# Altium PCB PCB.PcbDoc
Units mm, origin at the board's own origin, x right, y up, seen from the top; angles counter-clockwise.
Board outline 38.37 x 34.69 mm, 2 copper layers (Top Layer, Bottom Layer); 23 components, 37 nets, 114 pads, 53 vias.
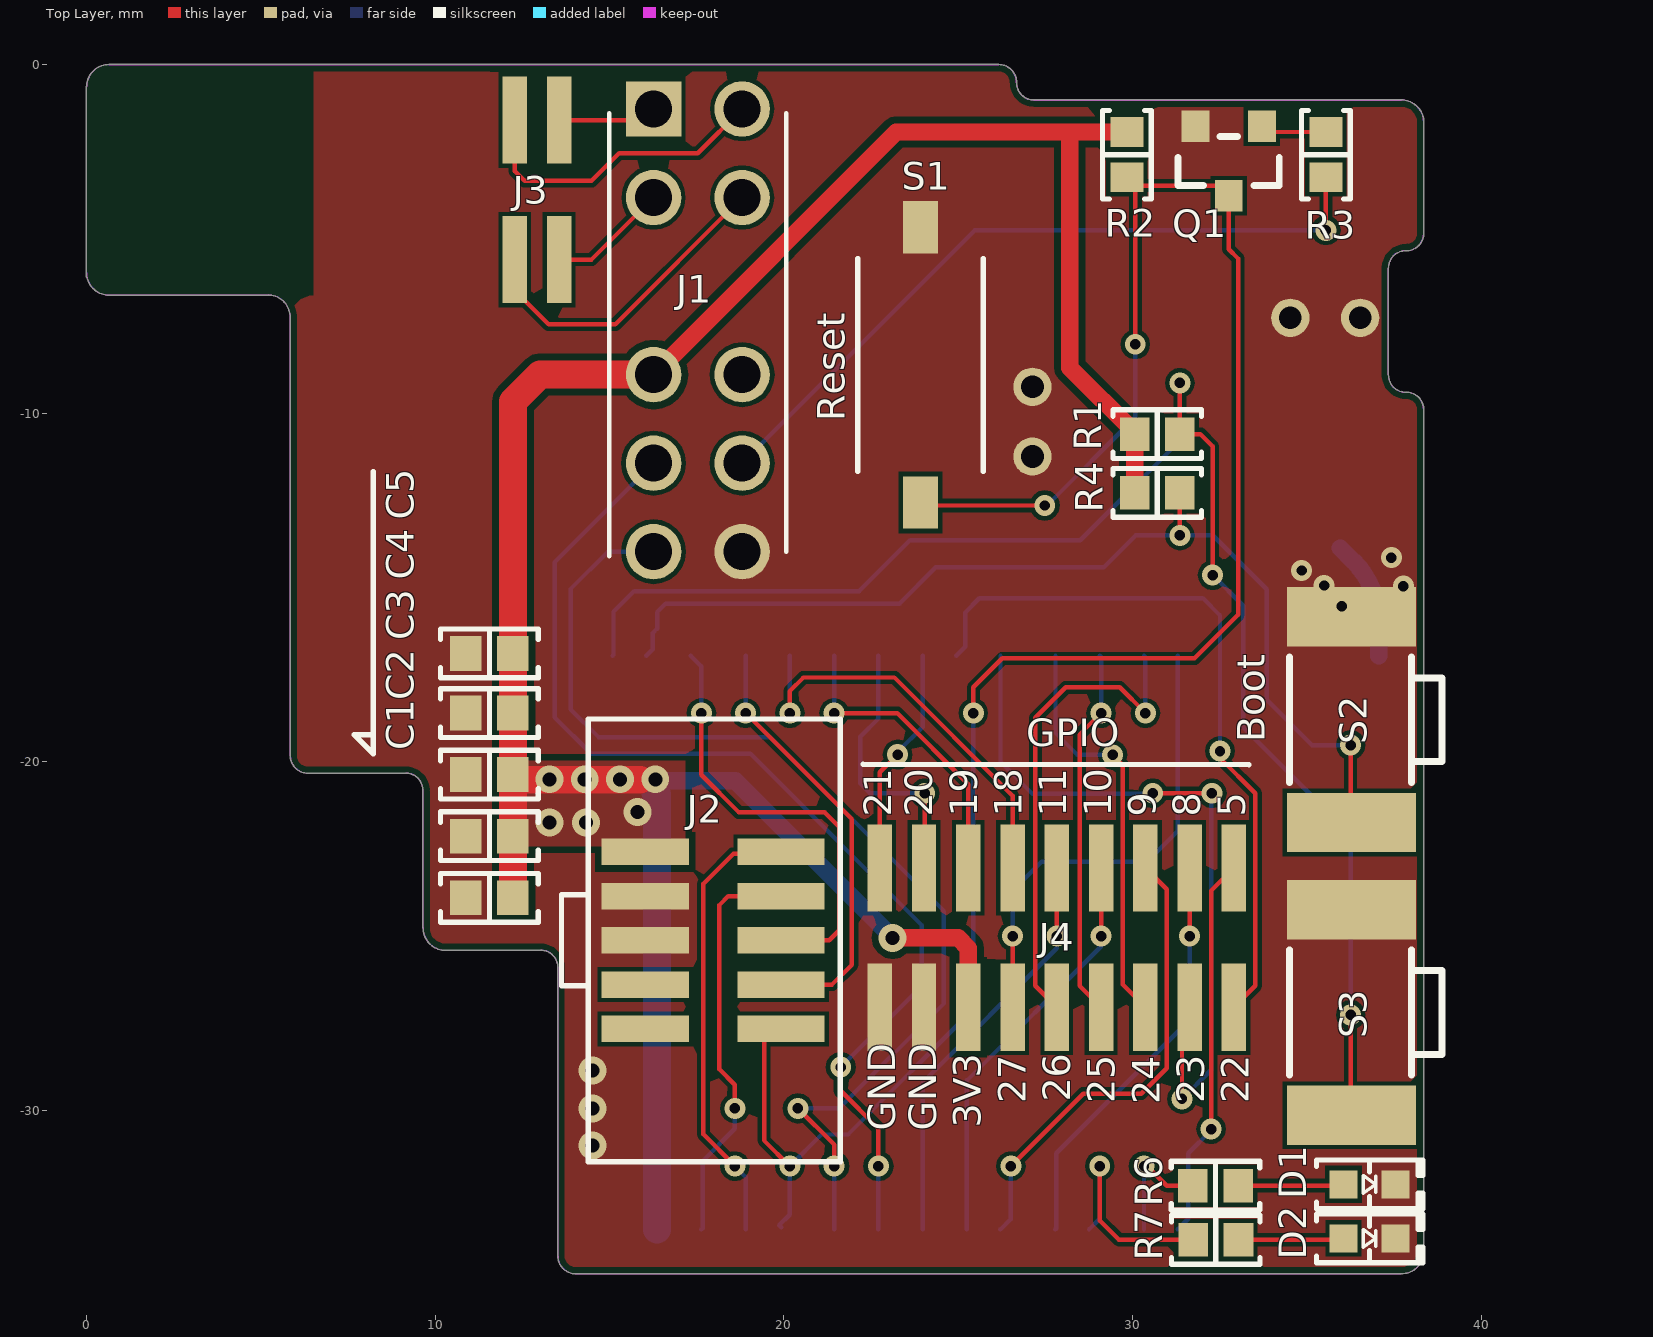
[diagram p0: Top Layer view]
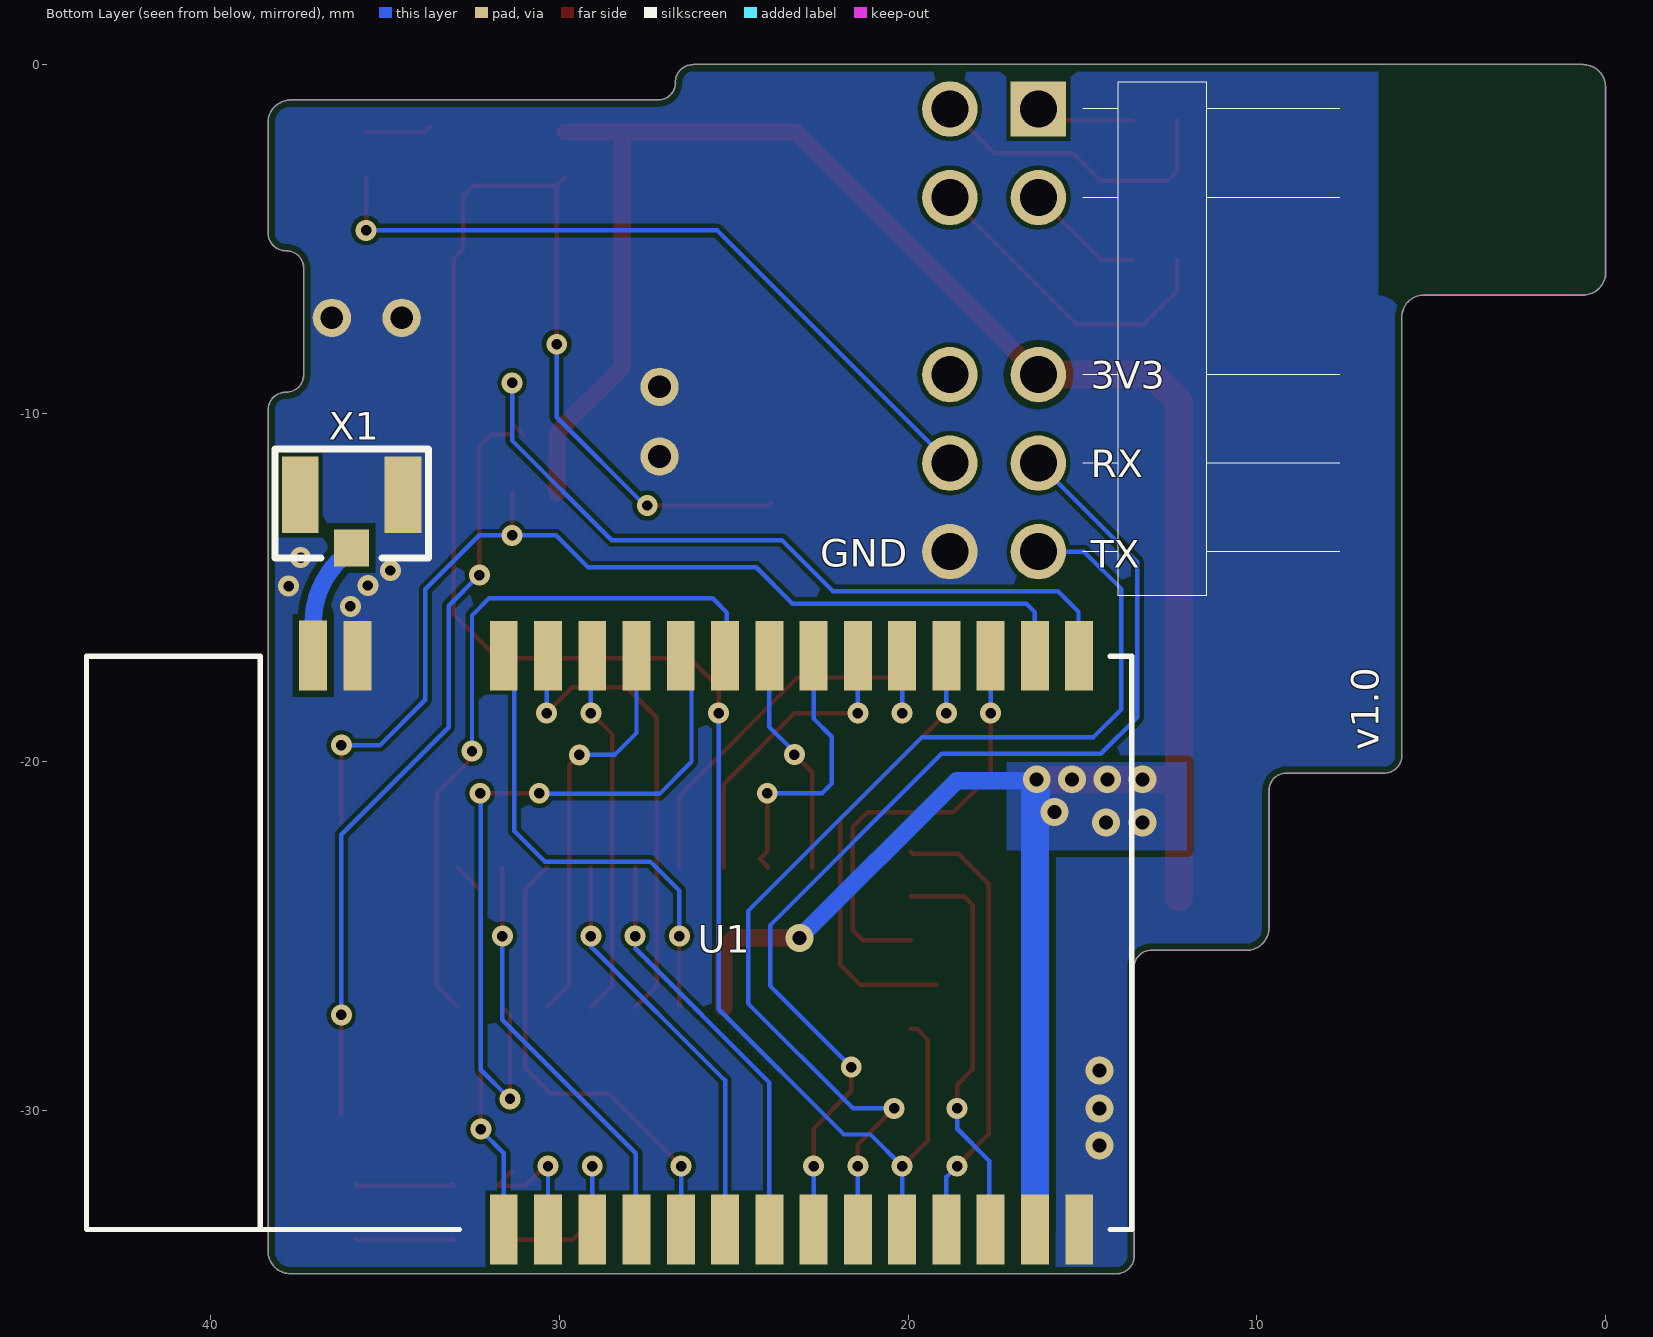
[diagram p1: Bottom Layer view, seen from below]
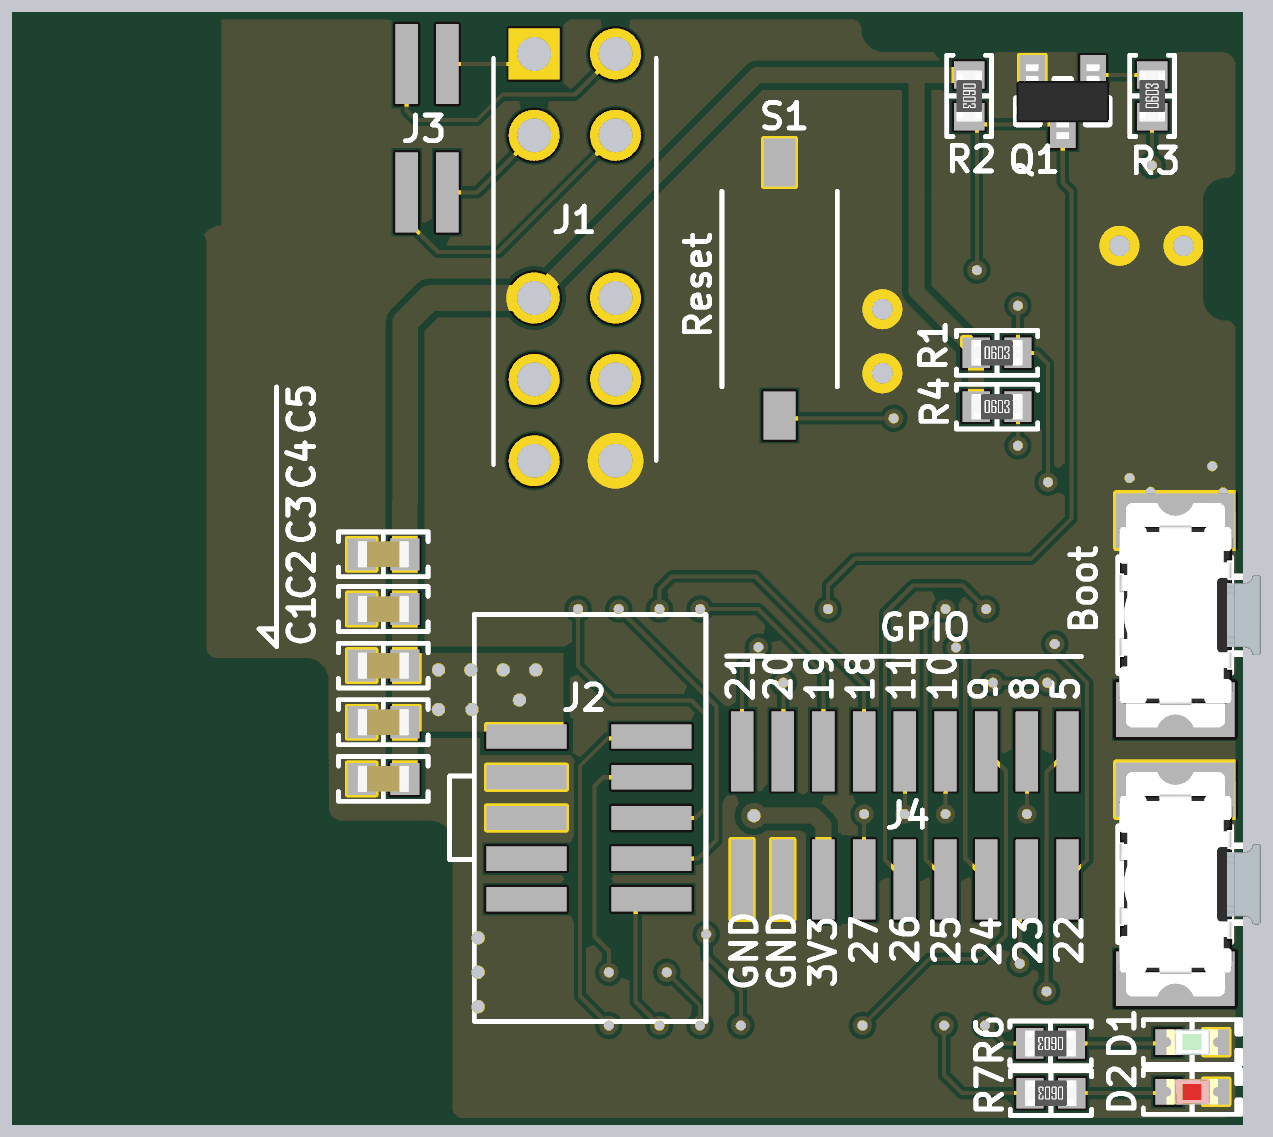
[diagram p2: 3D render of the assembled board from above, using the file's embedded part models]

## Layer stack, top to bottom
Top Solder: solder mask 0.0102, Solder Resist, Dk 3.5
Top Layer: signal copper 0.0356
Dielectric 1: dielectric 0.32, FR-4, Dk 4.8
Bottom Layer: signal copper 0.0356
Bottom Solder: solder mask 0.0102, Solder Resist, Dk 3.5

## Board outline
9.643,-24.765 9.643,-20.82 ccw(c9.15,-20.82) 9.15,-20.327 6.34,-20.327 cw(c6.34,-20.32) 6.34,-20.327 ccw(c6.34,-19.82) 6.34,-20.327 cw(c6.34,-19.82) 5.833,-19.82 cw(c5.84,-19.82) 5.833,-19.82 5.833,-7.239 ccw(c5.205,-7.239) 5.205,-6.611 0.633,-6.611 cw(c0.633,-5.969) 0.005,-6.098 cw(c-0.002,-6.096) -0.009,-6.096 -0.009,-0.635 cw(c0.633,-0.635) 0.633,0.007 26.168,0.007 cw(c26.168,-0.5) 26.675,-0.5 26.675,-0.516 ccw(c27.168,-0.516) 27.168,-1.009 37.717,-1.009 cw(c37.717,-1.651) 38.359,-1.651 38.359,-4.834 cw(c38.352,-4.834) 38.359,-4.834 cw(c37.852,-4.834) 37.852,-5.341 37.836,-5.341 cw(c37.836,-5.834) 37.836,-5.341 ccw(c37.836,-5.834) 37.343,-5.834 37.343,-8.898 ccw(c37.836,-8.898) 37.836,-9.391 37.852,-9.391 cw(c37.852,-9.898) 38.359,-9.898 cw(c38.352,-9.898) 38.358,-9.902 cw(c38.352,-9.906) 38.359,-9.906 38.359,-34.043 cw(c38.352,-34.045) 38.359,-34.045 cw(c37.717,-34.045) 37.717,-34.687 14.02,-34.687 cw(c14.02,-34.18) 13.513,-34.18 13.513,-25.9 ccw(c13.02,-25.9) 13.021,-25.407 cw(c13.02,-25.4) 13.02,-25.407 10.285,-25.407 cw(c10.285,-24.765)

## Design rules (kind name [scope] priority, off if disabled: settings)
BoardOutlineClearance BoardOutlineClearance_BottomSIlk [OnLayer('Bottom Overlay')] p1: gap=0 ignorepadtopadclearanceinfootprint=FALSE
BoardOutlineClearance BoardOutlineClearance_TopSIlk [OnLayer('Top Overlay')] p2: gap=0 ignorepadtopadclearanceinfootprint=FALSE
BoardOutlineClearance [All] p3: gap=0.2 ignorepadtopadclearanceinfootprint=FALSE
Clearance Ant_Spacing [InPolygon vs (InNet('ANT') OR InNet('NetC5_2'))] p1: gap=0.2 ignorepadtopadclearanceinfootprint=FALSE
Clearance Ant_Spacing_1 [InPolygon vs InNet('+3.3V')] p2: gap=0.2 ignorepadtopadclearanceinfootprint=FALSE
Clearance [All] p3: gap=0.127 ignorepadtopadclearanceinfootprint=FALSE except(0.2: Arc-SMDPad Track-SMDPad; 0.25: Arc-Hole Track-Hole SMDPad-Hole THPad-Hole Via-Hole Fill-Hole Poly-Hole Region-Hole Text-Hole; 0.254: Arc-Via Track-Via)
ComponentClearance [All] p1: gap=0.127 collisioncheckmode=3 verticalgap=0.127 showdistances=TRUE
DiffPairsRouting [All] p1: maxlimit=0.254 minlimit=0.127 mostfreqgap=0.127 toplayer_minwidth=0.127 toplayer_maxwidth=25.4 toplayer_prefwidth=0.127 bottomlayer_minwidth=0.127 bottomlayer_maxwidth=25.4 bottomlayer_prefwidth=0.127 maxuncoupledlength=12.7
Height [All] p1: minheight=0 maxheight=1816.048 prefheight=12.7
HoleSize [All] p1: absolutevalues=TRUE maxlimit=6.3 minlimit=0.3 maxpercent=80.000 minpercent=20.000
HoleToHoleClearance [All] p1: gap=0.25 allowstackedmicrovias=FALSE
MinimumAnnularRing [All] p1: minimumring=0.076
MinimumSolderMaskSliver [All] p1: minsoldermaskwidth=0
PlaneClearance [All] p1: clearance=0.127
PlaneConnect PlaneConnectPowerPads [InPadClass('PowerPads')] p1: planeconnectstyle=Direct reliefexpansion=0.508 reliefentries=4 reliefconductorwidth=0.254 reliefairgap=0.254
PlaneConnect [All] p2: pad.planeconnectstyle=Relief pad.reliefexpansion=0.3 pad.reliefentries=4 pad.reliefconductorwidth=0.127 pad.reliefairgap=0.127 via.planeconnectstyle=Direct via.reliefexpansion=0.3 via.reliefentries=4 via.reliefconductorwidth=0.127 via.reliefairgap=0.127
PolygonConnect PolygonConnectPowerPads [All vs (InPadClass('PowerPads'))] p1: connectstyle=Direct reliefconductorwidth=0.254 reliefentries=4 polygonreliefangle="90 Angle" airgapwidth=0.254
PolygonConnect [All] p2: connectstyle=Direct reliefconductorwidth=0.127 reliefentries=4 polygonreliefangle="90 Angle" airgapwidth=0.127
RoutingVias [All] p1: holewidth=0.3 width=0.6 viastyle="Through Hole" minholewidth=0.3 minwidth=0.6 maxholewidth=0.6 maxwidth=6.6
SilkToSilkClearance [All] p1: silktosilkclearance=0
SilkToSolderMaskClearance [IsPad] p1: minsilkscreentomaskgap=0.1 clearancetoexposedcopper=TRUE
SolderMaskExpansion SolderMaskExpansion_Via [IsVia] p1: expansion=0.102 istentingtop=TRUE
SolderMaskExpansion [All] p2: expansion=0.075 istentingtop=FALSE
Width Antenna [InNet('ANT')] p1: maxlimit=0.5 minlimit=0.5 preferedwidth=0.5 minimp=50.000000 maximp=50.000000 favimp=50.000000
Width Signal [(InNet('PB*') OR InNet('PA*') OR InNet('DIO*') OR InNet('SWD*') OR InNet('I2C*'))] p2: maxlimit=0.254 minlimit=0.127 preferedwidth=0.127 minimp=50.000000 maximp=50.000000 favimp=50.000000
Width Power [InNet('+3.3V')] p3: maxlimit=2 minlimit=0.5 preferedwidth=0.5 minimp=50.000000 maximp=50.000000 favimp=50.000000
Width [All] p4: maxlimit=25.4 minlimit=0.127 preferedwidth=0.127 minimp=50.000000 maximp=50.000000 favimp=50.000000
20 further rules are at their usual default settings.

## Components (designator, comment, footprint, x,y, rotation, side; value= is the part's Value field where it differs from the comment)
C1 "10µF" "CAP 0603_1608" 11.55,-23.9 r180 top
C2 "10µF" "CAP 0603_1608" 11.55,-22.133 r180 top
C3 "1µF" "CAP 0603_1608" 11.55,-20.367 r180 top
C4 "0.1µF" "CAP 0603_1608" 11.55,-18.6 r0 top
C5 "10µF" "CAP 0603_1608" 11.55,-16.89 r180 top
D1 "Green" "LED 0603_1608 GREEN" 36.8,-32.12 r0 top
D2 "Red" "LED 0603_1608 RED" 36.8,-33.67 r0 top
J1 "C60565" C60565 16.26,-1.27 r0 top locked
J2 "JTAG Connector" 2X1.27X10 16.02,-22.58 r0 top
J3 "Pins" 1.27x4 13.55,-1.59 r180 top
J4 "GPIO" 1.27x18 32.91,-23.04 r270 top
Q1 "BC847CLT1G" "ON SEMI SOT-23-3" 32.76,-2.76 r270 top
R1 "10 kOhms" "RES 0603_1608" 30.71,-10.6 r0 top
R2 "10 kOhms" "RES 0603_1608" 29.84,-2.58 r270 top
R3 "10 kOhms" "RES 0603_1608" 35.55,-2.58 r90 top
R4 "10 kOhms" "RES 0603_1608" 30.71,-12.28 r0 top
R6 "470 Ohms" "RES 0603_1608" 32.38,-32.16 r180 top
R7 "470 Ohms" "RES 0603_1608" 32.39,-33.71 r180 top
S1 "K2-1107ST-A3SW-06" BTN 23.92,-12.56 r0 top
S2 "KSS331GLFS" "C&K KSS" 36.28,-18.79 r90 top
S3 "KSS331GLFS" "C&K KSS" 36.28,-27.19 r90 top
U1 "RF-BM-2652P2" RF-BM-2652P2 31.6,-33.415 r90 bottom locked
X1 "U.FL-R-SMT(01)" "CON: u.Fl" 35.965,-12.34 r180 bottom

## Footprints (in the part's own frame and the unit in brackets; to place one, negate y for a bottom-side part, rotate by r counter-clockwise, add the part's x,y. Pads: shape width x height; smd on the part's side, far side on the other; paste and mask are expansions set on the pad)
1.27x4 [mm]
  rect 0.7x2.5 smd: 1(0,4) 2(1.27,4) 3(0,0) 4(1.27,0)
1.27x18 [mm]
  rect 2.5x0.7 smd: 1(0,0) 2(4,0) 3(0,-1.27) 4(4,-1.27) 5(0,-2.54) 6(4,-2.54) 7(0,-3.81) 8(4,-3.81) 9(0,-5.08) 10(4,-5.08) 11(0,-6.35) 12(4,-6.35) 13(0,-7.62) 14(4,-7.62) 15(0,-8.89) 16(4,-8.89) 17(0,-10.16) 18(4,-10.16)
2X1.27X10 [mm]
  rect 2.5x0.76 smd: 1(0,0) 2(3.9,0) 3(0,-1.27) 4(3.9,-1.27) 5(0,-2.54) 6(3.9,-2.54) 7(0,-3.81) 8(3.9,-3.81) 9(0,-5.08) 10(3.9,-5.08)
  silkscreen extent -2.4,-8.89 5.6,3.81
BTN [mm]
  rect 1x1.5 smd: 1(0,0) 2(0,7.9)
  silkscreen extent -1.8,0.9 1.8,7, body extent -1.83,-0.13 1.83,7.93, height 2.51
C60565 [mm] "Pin Header 12 2 right-angle,90degrees 2.54mm P=2.54mm Pin Header & Female Header RoHS"
  rect 1.59x1.59 hole 1.06: 1(0,0)
  round 1.59 hole 1.06: 2(2.54,0) 3(0,-2.54) 4(2.54,-2.54) 7(0,-7.62) 8(2.54,-7.62) 9(0,-10.16) 10(2.54,-10.16) 11(0,-12.7) 12(2.54,-12.7)
  silkscreen extent -1.27,-12.83 3.81,-0.13
"C&K KSS" [mm] "SMT Switch, 2-leads, body 5.5x3.5mm, C&K KSS331GLFS"
  rect 1.7x3.7 smd mask+0.1: 1(-2.95,0) 2(2.95,0)
  silkscreen extent -1.8,-2.6 1.8,1.78, body extent -3.5,-2.65 3.5,1.76, height 2.28
"CAP 0603_1608" [mm] "Chip Capacitor, 2-Leads, Body 1.60x0.80mm, IPC Medium Density"
  rect 0.9x1 smd: 1(-0.675,0) 2(0.675,0)
  silkscreen extent -1.4,-0.7 1.4,0.7, body extent -0.8,-0.41 0.8,0.41, height 0.82
"CON: u.Fl" [mm]
  rect 1x1.05 smd: 1(0,-1.525)
  rect 1.05x2.2 smd: 2(1.475,0) 3(-1.475,0)
  silkscreen extent -2.2,-1.81 2.2,1.31, body extent -1.5,-1.71 1.5,1.14, height 1.27
"LED 0603_1608 GREEN" [mm] "Chip Diode, 2-Leads, Body 1.60x0.80mm, IPC Medium Density"
  rect 0.8x0.8 smd: 1(-0.75,0) 2(0.75,0)
  silkscreen extent -1.52,-0.7 1.52,0.7, body extent -0.8,-0.4 0.8,0.4, height 0.53
"LED 0603_1608 RED" [mm] "Chip Diode, 2-Leads, Body 1.60x0.80mm, IPC Medium Density"
  rect 0.8x0.8 smd: 1(-0.75,0) 2(0.75,0)
  silkscreen extent -1.52,-0.7 1.52,0.7, body extent -0.8,-0.4 0.8,0.4, height 0.53
"ON SEMI SOT-23-3" [mm] "SOT23, 3-Leads, Body 2.90x2.40mm, Pitch 0.95mm, IPC Medium Density"
  rect 0.9x0.8 smd: 1(-1,0.95) 2(-1,-0.95) 3(1,0)
  silkscreen extent -0.7,-1.45 0.7,1.45, body extent -1.16,-1.45 1.16,1.45, height 1
"RES 0603_1608" [mm] "Chip Resistor, 2-Leads, Body 1.60x0.80mm, IPC Medium Density"
  rect 0.85x0.95 smd: 1(-0.65,0) 2(0.65,0)
  silkscreen extent -1.27,-0.7 1.27,0.7, body extent -0.8,-0.4 0.8,0.4, height 0.45
RF-BM-2652P2 [mm]
  rect 2x0.8 smd: 1(0,0) 2(0,-1.27) 3(0,-2.54) 4(0,-3.81) 5(0,-5.08) 6(0,-6.35) 7(0,-7.62) 8(0,-8.89) 9(0,-10.16) 10(0,-11.43) 11(0,-12.7) 12(0,-13.97) 13(0,-15.24) 14(0,-16.51) 15(16.462,-16.509) 16(16.462,-15.239) 17(16.462,-13.969) 18(16.462,-12.699) 19(16.462,-11.429) 20(16.462,-10.159) 21(16.462,-8.889) 22(16.462,-7.619) 23(16.462,-6.349) 24(16.462,-5.079) 25(16.462,-3.809) 26(16.462,-2.539) 27(16.462,-1.269) 28(16.462,0.001) 29(16.458,4.199) 30(16.465,5.469)
  silkscreen extent 0,-18.02 16.45,11.97

## Part data
C1 C2 C5: library part GRM188R60J106ME47D, "CAP CER 10UF 6.3V X5R 0603", Device Package="0603 (1608 Metric)", Manufacturer="Murata Electronics", Operating Temperature="-55°C ~ 85°C", Supplier Part Number 1=490-3896-1-ND, Temperature Coefficient=X5R, Tolerance=±20%, Voltage - Rated=6.3V, Applications="General Purpose", Capacitance=10µF, ComponentLink1Description=Datasheet, ComponentLink1URL=https://www.murata.com/~/media/webrenewal/support/library/catalog/products/capacitor/mlcc/c02e.ashx?la=en-us, ComponentLink2Description="DigiKey Link", ComponentLink2URL=http://digikey.com/product-detail/en/murata-electronics/GRM188R60J106ME47D/490-3896-1-ND/965938, LastUpdated="2020-09-02 01:03:35.500000", Lifecycle Status=Active, Minimum Order=1, Mounting Type="Surface Mount, MLCC", Package / Case="0603 (1608 Metric)", Packaging=TapeAndReel, Part Number=GRM188R60J106ME47D, Part Status=Active, PartId=2351, Price=0.03, Series=GRM, Size / Dimension="0.063 L x 0.031 W (1.60mm x 0.80mm)", Supplier 1=DigiKey, Thickness (Max)="0.035 (0.90mm)"
C3: library part GCM188R71C105KA64D, "CAP CER 1UF 16V X7R 0603", Device Package="0603 (1608 Metric)", Manufacturer="Murata Electronics", Operating Temperature="-55°C ~ 125°C", Ratings=AEC-Q200, Supplier Part Number 1=490-5241-1-ND, Temperature Coefficient=X7R, Tolerance=±10%, Voltage - Rated=16V, Applications=Automotive, Capacitance=1µF, ComponentLink1Description=Datasheet, ComponentLink1URL=https://www.murata.com/~/media/webrenewal/support/library/catalog/products/capacitor/mlcc/c03e.ashx?la=en-us, ComponentLink2Description="DigiKey Link", ComponentLink2URL=http://digikey.com/product-detail/en/murata-electronics/GCM188R71C105KA64D/490-5241-1-ND/1979252, LastUpdated="2020-09-02 01:03:17.027000", Lifecycle Status=Active, Minimum Order=1, Mounting Type="Surface Mount, MLCC", Package / Case="0603 (1608 Metric)", Packaging=TapeAndReel, Part Number=GCM188R71C105KA64D, Part Status=Active, PartId=12672, Price=0.04, Series=GCM, Size / Dimension="0.063 L x 0.031 W (1.60mm x 0.80mm)", Supplier 1=DigiKey, Thickness (Max)="0.035 (0.90mm)"
C4: library part GCJ188R71C104KA01D, "CAP CER 0.1UF 16V X7R 0603", Device Package="0603 (1608 Metric)", Manufacturer="Murata Electronics", Operating Temperature="-55°C ~ 125°C", Ratings=AEC-Q200, Supplier Part Number 1=490-5796-1-ND, Temperature Coefficient=X7R, Tolerance=±10%, Voltage - Rated=16V, Applications="Automotive, Boardflex Sensitive", Capacitance=0.1µF, ComponentLink1Description=Datasheet, ComponentLink1URL=https://www.murata.com/~/media/webrenewal/support/library/catalog/products/capacitor/mlcc/c03e.ashx?la=en-us, ComponentLink2Description="DigiKey Link", ComponentLink2URL=http://digikey.com/product-detail/en/murata-electronics/GCJ188R71C104KA01D/490-5796-1-ND/2783830, Features="Soft Termination", LastUpdated="2020-09-02 01:03:00.960000", Lifecycle Status=Active, Minimum Order=1, Mounting Type="Surface Mount, MLCC", Package / Case="0603 (1608 Metric)", Packaging=TapeAndReel, Part Number=GCJ188R71C104KA01D, Part Status=Active, PartId=17928, Price=0.05, Series=GCJ, Size / Dimension="0.063 L x 0.031 W (1.60mm x 0.80mm)", Supplier 1=DigiKey, Thickness (Max)="0.035 (0.90mm)"
D1: library part APT1608CGCK, "LED GREEN CLEAR CHIP SMD", Current - Test=20mA, Device Package="0603 (1608 Metric)", Lens Color=Colorless, Manufacturer=Kingbright, Millicandela Rating=50mcd, Supplier Device Package="Chip LED", Supplier Part Number 1=754-1116-1-ND, Voltage - Forward (Vf) (Typ)=2.1V, Color=Green, ComponentLink1Description=Datasheet, ComponentLink1URL=http://www.kingbrightusa.com/images/catalog/SPEC/APT1608CGCK.pdf, ComponentLink2Description="DigiKey Link", ComponentLink2URL=http://digikey.com/product-detail/en/kingbright/APT1608CGCK/754-1116-1-ND/1747833, Configuration=Standard, Height (Max)=0.75mm, LastUpdated="2020-09-02 01:20:41.777000", Lens Size="1.20mm x 0.80mm", Lens Style="Rectangle with Flat Top", Lens Transparency=Clear, Lifecycle Status=Active, Minimum Order=1, Mounting Type="Surface Mount", Package / Case="0603 (1608 Metric)", Packaging=TapeAndReel, Part Number=APT1608CGCK, Part Status=Active, PartId=664, Price=0.07, Series=-, Size / Dimension="1.60mm L x 0.80mm W", Supplier 1=DigiKey, Viewing Angle=120°, Wavelength - Dominant=570nm, Wavelength - Peak=574nm
D2: library part APT1608EC, "LED RED CLEAR CHIP SMD", Current - Test=20mA, Device Package="0603 (1608 Metric)", Lens Color=Colorless, Manufacturer=Kingbright, Millicandela Rating=8mcd, Supplier Device Package="Chip LED", Supplier Part Number 1=754-1117-1-ND, Voltage - Forward (Vf) (Typ)=2V, Color=Red, ComponentLink1Description=Datasheet, ComponentLink1URL=http://www.kingbrightusa.com/images/catalog/SPEC/APT1608EC.pdf, ComponentLink2Description="DigiKey Link", ComponentLink2URL=http://digikey.com/product-detail/en/kingbright/APT1608EC/754-1117-1-ND/1747834, Configuration=Standard, Height (Max)=0.75mm, LastUpdated="2020-09-02 01:20:55.660000", Lens Size="1.20mm x 0.80mm", Lens Style="Rectangle with Flat Top", Lens Transparency=Clear, Lifecycle Status=Active, Minimum Order=1, Mounting Type="Surface Mount", Package / Case="0603 (1608 Metric)", Packaging=TapeAndReel, Part Number=APT1608EC, Part Status=Active, PartId=458, Price=0.06, Series=-, Size / Dimension="1.60mm L x 0.80mm W", Supplier 1=DigiKey, Viewing Angle=120°, Wavelength - Dominant=617nm, Wavelength - Peak=627nm
J1: "Pin Header 12 2 right-angle，90degrees 2.54mm P=2.54mm Pin Header & Female Header RoHS", Package=None, Availability=Unavailable, Check_prices=https://www.snapeda.com/parts/BG040-14-A-0300-0300-N-G/Global%20Connector%20Technology/view-part/2751851/?ref=eda, MF="Global Connector Technology", MP=BG040-14-A-0300-0300-N-G, Price=None, SnapEDA_Link=https://www.snapeda.com/parts/BG040-14-A-0300-0300-N-G/Global%20Connector%20Technology/view-part/2751851/?ref=snap
Q1: "TRANS NPN 45V 0.1A SOT23", Current - Collector (Ic) (Max)=100mA, Current - Collector Cutoff (Max)="15nA (ICBO)", DC Current Gain (hFE) (Min) @ Ic, Vce="420 @ 2mA, 5V", Frequency - Transition=100MHz, Manufacturer="ON Semiconductor", Operating Temperature="-55°C ~ 150°C (TJ)", Package / Case="TO-236-3, SC-59, SOT-23-3", Power - Max=300mW, Supplier Device Package="SOT-23-3 (TO-236)", Supplier Part Number 1=BC847CLT1GOSCT-ND, Voltage - Collector Emitter Breakdown (Max)=45V, ComponentLink1Description=Datasheet, ComponentLink1URL=http://www.onsemi.com/pub/Collateral/BC846ALT1-D.PDF, ComponentLink2Description="DigiKey Link", ComponentLink2URL=http://digikey.com/product-detail/en/on-semiconductor/BC847CLT1G/BC847CLT1GOSCT-ND/917836, LastUpdated="2020-09-02 01:30:09.047000", Lifecycle Status=Active, Minimum Order=1, Mounting Type="Surface Mount", Packaging=TapeAndReel, Part Number=BC847CLT1G, Part Status=Active, PartId=252, Price=0.02, Series=-, Supplier 1=DigiKey, Transistor Type=NPN, Vce Saturation (Max) @ Ib, Ic="600mV @ 5mA, 100mA"
R1 R2 R3 R4: library part RT0603DRD0710KL, "RES SMD 10K OHM 0.5% 1/10W 0603", Device Package="0603 (1608 Metric)", Manufacturer=Yageo, Operating Temperature="-55°C ~ 155°C", Power (Watts)="0.1W, 1/10W", Supplier Device Package=0603, Supplier Part Number 1=311-10KDCT-ND, Temperature Coefficient=±25ppm/°C, Tolerance=±0.5%, ComponentLink1Description=Datasheet, ComponentLink1URL=https://www.yageo.com/upload/media/product/productsearch/datasheet/rchip/PYu-RT_1-to-0.01_RoHS_L_11.pdf, ComponentLink2Description="DigiKey Link", ComponentLink2URL=http://digikey.com/product-detail/en/yageo/RT0603DRD0710KL/311-10KDCT-ND/1035680, Composition="Thin Film", Height - Seated (Max)="0.022 (0.55mm)", LastUpdated="2020-09-02 01:10:23.407000", Lifecycle Status=Active, Minimum Order=1, Number of Terminations=2, Package / Case="0603 (1608 Metric)", Packaging=TapeAndReel, Part Number=RT0603DRD0710KL, Part Status=Active, PartId=5487, Price=0.02, Resistance="10 kOhms", Series=RT, Size / Dimension="0.063 L x 0.031 W (1.60mm x 0.80mm)", Supplier 1=DigiKey
R6 R7: library part AT0603FRE07470RL, "RES SMD 470 OHM 1% 1/10W 0603", Device Package="0603 (1608 Metric)", Manufacturer=Yageo, Operating Temperature="-55°C ~ 155°C", Power (Watts)="0.1W, 1/10W", Ratings=AEC-Q200, Supplier Device Package=0603, Supplier Part Number 1=YAG2128CT-ND, Temperature Coefficient=±50ppm/°C, Tolerance=±1%, ComponentLink1Description=Datasheet, ComponentLink1URL=http://www.yageo.com/documents/recent/PYu-AT_51_RoHS_L_5.pdf, ComponentLink2Description="DigiKey Link", ComponentLink2URL=http://digikey.com/product-detail/en/yageo/AT0603FRE07470RL/YAG2128CT-ND/5139576, Composition="Thin Film", Features="Anti-Sulfur, Automotive AEC-Q200, Moisture Resistant", Height - Seated (Max)="0.022 (0.55mm)", LastUpdated="2020-09-02 01:10:20.073000", Lifecycle Status=Active, Minimum Order=1, Number of Terminations=2, Package / Case="0603 (1608 Metric)", Packaging=TapeAndReel, Part Number=AT0603FRE07470RL, Part Status=Active, PartId=7105, Price=0.02, Resistance="470 Ohms", Series=AT, Size / Dimension="0.063 L x 0.031 W (1.60mm x 0.80mm)", Supplier 1=DigiKey
S1: library part Btn
S2 S3: "SWITCH TACTILE SPST-NO 0.05A 50V", Contact Rating @ Voltage="0.05A @ 50VDC", Manufacturer=C&K, Operating Force=250gf, Operating Temperature="-40°C ~ 85°C", Supplier Part Number 1=401-1101-1-ND, Actuator Orientation="Side Actuated", Actuator Type="Rectangular Button", Circuit=SPST-NO, ComponentLink1Description=Datasheet, ComponentLink1URL=https://dznh3ojzb2azq.cloudfront.net/products/Tactile/KSS/documents/datasheet.pdf, ComponentLink2Description="DigiKey Link", ComponentLink2URL=http://digikey.com/product-detail/en/c-k/KSS331GLFS/401-1101-1-ND/417673, Features="Tactile Feedback", Illumination=Non-Illuminated, Ingress Protection=IP40, LastUpdated="2020-04-09 09:55:46.287000", Lifecycle Status=Active, Minimum Order=1, Mounting Type="Surface Mount, Right Angle", Outline="7.60mm x 3.70mm", Packaging=TapeAndReel, Part Number=KSS331GLFS, Part Status=Active, Price=0.35, Series=KSS, Supplier 1=DigiKey, Switch Function=Off-Mom, Termination Style="Gull Wing"
X1: Frequency=6GHz, Manufacturer="Hirose Electric", ValueManufacturerPartNumber="Connector u.FL, 50 Ohm, 6GHz", HelpURL=https://www.digikey.com/product-detail/en/hirose-electric-co-ltd/U.FL-R-SMT-01/H9161-ND/513010, Impedance="50 Ohm", PartNumber=U.FL-R-SMT(01), TypeConnector="Connector u.FL"

## Free pads (board coordinates)
  round 1.1 hole 0.65: 2(27.13,-11.24) 2(27.13,-9.24) 2(34.53,-7.26) 2(36.53,-7.26)

## Via types
v1: diameter 0.6, hole 0.3, Top Layer to Bottom Layer, tented both sides, 42 vias
v2: diameter 0.8, hole 0.4, Top Layer to Bottom Layer, tented both sides, 11 vias

## Nets (pads, with @x,y where several pads share a name; then routed paths per layer and width w, separated by ;. In a path a pad name is that pad's centre, name@x,y a point inside that pad or via, vN(x,y) a via of type N, cw(c..) or ccw(c..) an arc to the next point about the centre after c; other vN are vias at no path point)
+3.3V: C1.1 C2.1 C3.1 C4.2 C5.1 J1.7 J2.1 J4.14 R1.1 R2.1 R4.1 U1.13 | length 75.2
  Top Layer w0.5: J1.7 23.22,-1.93 28.346,-1.93 ; v2(23.12,-25.05) 24.997,-25.05 25.29,-25.343 J4.14 ; R2.1 28.346,-1.93 ; R4.1 R1.1 30.06,-10.55 28.2,-8.69 28.2,-2.076 28.346,-1.93
  Top Layer w0.8: C1.1 C2.1 C3.1@12.225,-20.513 ; 15.879,-20.513 C3.1@12.225,-20.513 ; J1.7 13,-8.89 12.23,-9.66 12.23,-15.265 12.225,-15.27 C3.1@12.225,-20.513
  Bottom Layer w0.5: v2@16.31,-20.89 16.66,-20.54 18.61,-20.54 v2(23.12,-25.05)
  Bottom Layer w0.8: v2@16.31,-20.89 16.36,-20.94 U1.13
  other v2: 13.272,-21.737 14.32,-21.737 15.8,-21.44 13.272,-20.5 14.285,-20.5 15.297,-20.5 16.31,-20.5
ANT: U1.30 X1.1 | length 3.4
  Bottom Layer w0.5: X1.1 36.325,-14.225 cw(c34.529,-16.021) 37.069,-16.021 U1.30
DIO5: J4.1 U1.1 | length 11
  Top Layer w0.127: v1(32.254,-30.536) 32.257,-30.532 32.257,-23.693 J4.1
  Bottom Layer w0.127: U1.1@31.291,-33.415 31.6,-33.106 31.6,-31.23 32.254,-30.576 v1(32.254,-30.536)
DIO8: J4.3 U1.4 | length 12
  Top Layer w0.127: v1@31.64,-25.01 J4.3
  Bottom Layer w0.127: U1.4 27.81,-33.395 27.81,-31.23 31.64,-27.4 v1@31.64,-25.01
  other v1: 31.64,-25
DIO9: J4.5 U1.5 | length 13.7
  Top Layer w0.127: v1(26.51,-31.6) 28.59,-29.52 30.25,-29.52 30.984,-28.786 30.984,-23.654 J4.5
  Bottom Layer w0.127: U1.5@26.211,-33.415 26.51,-33.116 v1(26.51,-31.6) v1@26.437,-31.6
DIO10: J4.7 U1.6 | length 12
  Top Layer w0.127: v1@29.1,-25.04 J4.7
  Bottom Layer w0.127: U1.6 25.25,-29.14 29.1,-25.29 v1@29.1,-25.04
  other v1: 29.1,-25
DIO11: J4.9 U1.7 | length 11.6
  Top Layer w0.127: v1(27.83,-25) J4.9
  Bottom Layer w0.127: U1.7 23.98,-29.2 27.83,-25.35
DIO18: J4.11 U1.19 | length 12.3
  Top Layer w0.127: v1(20.171,-18.6) 20.171,-17.969 20.56,-17.58 23.17,-17.58 26.56,-20.97 J4.11
  Bottom Layer w0.127: v1(20.171,-18.6) U1.19
DIO19: J4.13 U1.20 | length 8.7
  Top Layer w0.127: v1(21.441,-18.6) 23.25,-18.6 25.29,-20.64 J4.13
  Bottom Layer w0.127: v1(21.441,-18.6) U1.20
DIO20: J4.15 U1.21 | length 8.2
  Top Layer w0.127: J4.15 ccw(c23.972,-22.992) 24.04,-22.992 24.25,-22.782 24.04,-22.572 v1(24.04,-20.9)
  Bottom Layer w0.127: U1.21 22.711,-18.755 22.186,-19.28 22.186,-20.62 22.466,-20.9 v1(24.04,-20.9)
DIO21: J4.17 U1.22 | length 6.6
  Top Layer w0.127: J4.17 22.75,-20.3 v1(23.26,-19.79)
  Bottom Layer w0.127: v1(23.26,-19.79) 23.26,-19.72 23.981,-18.999 U1.22
DIO22: J4.2 U1.23 | length 20.9
  Top Layer w0.127: v1(32.51,-19.69) 32.51,-19.886 33.524,-20.9 33.524,-26.426 J4.2
  Bottom Layer w0.127: U1.23@24.942,-16.953 25.199,-16.696 25.199,-15.716 25.605,-15.31 32.02,-15.31 32.51,-15.8 v1(32.51,-19.69)
DIO23: J4.4 U1.24 | length 21.4
  Top Layer w0.127: v1(30.58,-20.9) v1@32.27,-20.9 ; v1(31.42,-29.67) 31.42,-27.26 J4.4 ; v1(32.28,-20.9) v1@32.27,-20.9 ; v1@32.28,-20.89 v1@32.27,-20.9
  Bottom Layer w0.127: U1.24@26.212,-16.953 26.212,-20 27.132,-20.92 30.56,-20.92 v1(30.58,-20.9) ; v1(31.42,-29.67) 32.257,-28.833 32.257,-20.913 v1@32.28,-20.89
DIO24: J4.6 U1.25 | length 11.7
  Top Layer w0.127: v1(29.43,-19.8) 29.717,-20.088 29.717,-26.387 J4.6
  Bottom Layer w0.127: U1.25 27.791,-19.171 28.42,-19.8 v1(29.43,-19.8)
DIO25: J4.8 U1.26 | length 10.6
  Top Layer w0.127: J4.8 28.483,-26.422 28.483,-19.218 v1(29.1,-18.6)
  Bottom Layer w0.127: U1.26 29.1,-16.992 v1(29.1,-18.6)
DIO26: J4.10 U1.27 | length 14
  Top Layer w0.127: J4.10 27.212,-26.422 27.212,-18.738 28.087,-17.863 29.633,-17.863 v1(30.37,-18.6)
  Bottom Layer w0.127: U1.27 30.37,-16.992 v1(30.37,-18.6)
DIO27: J4.12 U1.28 | length 13.8
  Top Layer w0.127: J4.12 v1(26.56,-25)
  Bottom Layer w0.127: v1(26.56,-25) 26.56,-23.7 27.4,-22.86 30.42,-22.86 31.292,-21.988 U1.28@31.292,-16.953
GND: C1.2 C2.2 C3.2 C4.1 C5.2 D1.2 D2.2 J1.12 J2.3 J2.5 J4.16 J4.18 pad.2 Q1.2 S1.2 S2.2 S3.2 U1.14 U1.29 X1.2
  other v1: 36,-15.54 37.77,-14.96 35.5,-14.94 34.85,-14.51 37.43,-14.14
  other v2: 14.51,-31.01 14.51,-29.94 14.51,-28.86
NetD1_1: D1.1 R6.1 | length 2.9
  Top Layer w0.127: R6.1@33.127,-32.12 ccw(c33.127,-32.257) R6.1 35.81,-32.16 D1.1@35.85,-32.12
NetD2_1: D2.1 R7.1 | length 2.9
  Top Layer w0.127: R7.1@33.137,-33.67 ccw(c33.137,-33.807) R7.1 35.81,-33.71 D2.1@35.85,-33.67
NetJ1_1: J1.1 J3.3 | length 2.8
  Top Layer w0.127: J3.3 15.94,-1.59 J1.1
NetJ1_2: J1.2 J3.4 | length 8.9
  Top Layer w0.127: J3.4 12.28,-3.05 12.56,-3.33 14.48,-3.33 15.27,-2.54 17.53,-2.54 J1.2
NetJ1_3: J1.3 J3.1 | length 3.4
  Top Layer w0.127: J3.1 14.48,-5.59 J1.3
NetJ1_4: J1.4 J3.2 | length 9.3
  Top Layer w0.127: J3.2 12.28,-6.49 12.567,-6.776 12.577,-6.776 13.25,-7.45 15.16,-7.45 J1.4
NetJ1_10: J1.10 R3.1 | length 21
  Top Layer w0.127: v1(35.55,-4.75) R3.1
  Bottom Layer w0.127: J1.10 25.48,-4.75 v1(35.55,-4.75)
NetQ1_1: Q1.1 R3.2 | length 1.9
  Top Layer w0.127: Q1.1 33.88,-1.93 R3.2
NetR1_2: R1.2 S3.1 U1.15 | length 44.7
  Top Layer w0.127: R1.2@31.04,-10.61 31.36,-10.29 v1(31.36,-9.13) ; R1.2 31.95,-10.6 32.3,-10.95 v1(32.3,-14.64) ; v1(36.26,-27.26) 36.26,-30.12 S3.1
  Bottom Layer w0.127: U1.15 15.11,-16.934 15.11,-15.695 15.705,-15.1 22.16,-15.1 23.62,-13.64 28.5,-13.64 31.36,-10.78 v1(31.36,-9.13) ; v1(32.3,-14.64) 33.18,-15.52 33.18,-19.01 36.26,-22.09 v1(36.26,-27.26)
NetR4_2: R4.2 S2.1 U1.16 | length 30
  Top Layer w0.127: v1(31.36,-13.502) R4.2 ; v1(36.26,-19.52) 36.26,-21.72 S2.1
  Bottom Layer w0.127: U1.16@16.052,-16.953 16.233,-16.772 16.233,-16.304 16.361,-16.176 16.361,-15.709 16.61,-15.46 23.319,-15.46 24.359,-14.42 29.18,-14.42 30.098,-13.502 v1(31.36,-13.502) 32.302,-13.502 33.85,-15.05 33.85,-18.22 35.15,-19.52 v1(36.26,-19.52)
NetR6_2: R6.2 U1.2 | length 4
  Top Layer w0.127: v1(30.33,-31.6) 30.424,-31.6 30.984,-32.16 R6.2 31.73,-32.11 R6.2@31.368,-31.748
  Bottom Layer w0.127: U1.2 v1@30.33,-31.639
NetR7_2: R7.2 U1.3 | length 6.3
  Top Layer w0.127: v1@29.06,-31.639 29.06,-33.16 29.61,-33.71 R7.2
  Bottom Layer w0.127: U1.3@28.751,-33.415 29.06,-33.106 v1@29.06,-31.639
  other v1: 29.06,-31.6
RESET_N: J2.10 Q1.3 R2.2 S1.1 U1.10 | length 60.4
  Top Layer w0.127: J2.10 19.747,-27.66 19.43,-27.977 19.43,-30.86 v1(20.17,-31.6) ; S1.1 24.005,-12.645 v1(27.482,-12.645) ; v1(25.433,-18.6) 25.433,-17.863 26.266,-17.03 31.78,-17.03 33.03,-15.78 33.03,-5.56 32.76,-5.29 Q1.3 32.47,-3.47 R2.2@30.08,-3.47 ; R2.2 R2.2@30.08,-3.47 ; v1(30.08,-8.02) R2.2@30.08,-3.47
  Bottom Layer w0.127: U1.10@19.92,-33.356 19.861,-33.298 20.17,-32.989 v1(20.17,-31.6) 21.08,-30.69 21.84,-30.69 25.433,-27.097 v1(25.433,-18.6) ; v1(27.482,-12.645) 27.545,-12.645 30.08,-10.11 v1(30.08,-8.02)
RX: J1.9 U1.8 | length 31.6
  Top Layer w0.127: v1(21.63,-28.756) 21.63,-29.439 22.71,-30.519 v1(22.71,-31.6)
  Bottom Layer w0.127: J1.9 13.42,-14.27 13.42,-18.72 14.47,-19.77 19.038,-19.77 23.96,-24.692 23.96,-26.426 v1(21.63,-28.756) ; U1.8 v1(22.71,-31.6)
TCKC: J2.4 U1.12 | length 11.8
  Top Layer w0.127: v1(18.591,-29.94) 18.591,-29.261 18.15,-28.82 18.15,-24.106 18.406,-23.85 J2.4
  Bottom Layer w0.127: U1.12 17.67,-33.375 17.67,-31.45 18.591,-30.529 v1(18.591,-29.94)
TDI: J2.8 U1.18 | length 13.1
  Top Layer w0.127: v1(18.901,-18.6) 21.95,-21.649 21.95,-25.82 21.38,-26.39 J2.8 J2.8@19.187,-26.39
  Bottom Layer w0.127: v1(18.901,-18.6) U1.18
TDO: J2.6 U1.17 | length 12.9
  Top Layer w0.127: v1(17.631,-18.6) 17.631,-20.371 18.71,-21.45 21.17,-21.45 21.59,-21.87 21.59,-24.832 21.302,-25.12 J2.6
  Bottom Layer w0.127: U1.17@17.322,-16.953 17.631,-17.261 v1(17.631,-18.6)
TMSC: J2.2 U1.11 | length 13
  Top Layer w0.127: v1@18.591,-31.589 17.69,-30.687 17.69,-23.5 18.554,-22.636 19.864,-22.636 J2.2
  Bottom Layer w0.127: v1(18.591,-31.6) 18.9,-31.909 U1.11
TX: J1.11 U1.9 | length 31.4
  Top Layer w0.127: v1(20.4,-29.94) 21.44,-30.98 v1(21.44,-31.6)
  Bottom Layer w0.127: J1.11 14.95,-13.97 13.88,-15.04 13.88,-18.49 14.68,-19.29 19.6,-19.29 24.59,-24.28 24.59,-26.93 21.58,-29.94 v1(20.4,-29.94) ; U1.9 v1(21.44,-31.6)
pads on no net: J1.8 J2.7 J2.9 X1.3

## Polygon pours and split planes (outlines as drawn)
+3.3V on Top Layer "NONET_L-01_P-001" (solid, pour order 5): 12.57,-22.42 17.17,-22.42 17.17,-19.97 12.57,-19.97
GND on Top Layer "Top" (solid, pour order 1): 10.311,-25.428 13.046,-25.428 cw(c13.046,-25.928) 13.546,-25.928 13.546,-34.208 ccw(c14.047,-34.208) 14.047,-34.708 37.744,-34.708 ccw(c37.744,-34.073) 38.379,-34.073 38.378,-34.073 38.378,-9.926 ccw(c37.878,-9.926) 37.878,-9.426 37.863,-9.426 cw(c37.863,-8.926) 37.362,-8.926 37.362,-5.862 cw(c37.863,-5.862) 37.863,-5.362 37.878,-5.362 ccw(c37.878,-4.862) 38.378,-4.862 38.378,-1.679 ccw(c37.743,-1.679) 37.743,-1.044 27.195,-1.044 cw(c27.195,-0.544) 26.694,-0.544 26.694,-0.528 ccw(c26.194,-0.528) 26.194,-0.028 6.504,-0.028 6.504,-6.629 ccw(c6.504,-7.267) 5.866,-7.267 5.866,-19.848 ccw(c6.367,-19.848) 6.367,-20.348 9.176,-20.348 cw(c9.176,-20.848) 9.676,-20.848 9.676,-24.793 ccw(c10.311,-24.793)
+3.3V on Top Layer "NONET_L-01_P-001" (solid, pour order 3): 12.225,-20.513 12.225,-22.28 14.32,-22.28 14.32,-20.513
GND on Bottom Layer "Bottom" (solid, remove dead copper, pour order 0): 10.311,-25.428 13.046,-25.428 cw(c13.046,-25.928) 13.546,-25.928 13.546,-34.208 ccw(c14.047,-34.208) 14.047,-34.708 37.744,-34.708 ccw(c37.744,-34.073) 38.379,-34.073 38.378,-34.073 38.378,-9.926 ccw(c37.878,-9.926) 37.878,-9.426 37.863,-9.426 cw(c37.863,-8.926) 37.362,-8.926 37.362,-5.862 cw(c37.863,-5.862) 37.863,-5.362 37.878,-5.362 ccw(c37.878,-4.862) 38.378,-4.862 38.378,-1.679 ccw(c37.743,-1.679) 37.743,-1.044 27.195,-1.044 cw(c27.195,-0.544) 26.694,-0.544 26.694,-0.528 ccw(c26.194,-0.528) 26.194,-0.028 6.504,-0.028 6.504,-6.629 ccw(c6.504,-7.267) 5.866,-7.267 5.866,-19.848 ccw(c6.367,-19.848) 6.367,-20.348 9.176,-20.348 cw(c9.176,-20.848) 9.676,-20.848 9.676,-24.793 ccw(c10.311,-24.793)
+3.3V on Bottom Layer "NONET_L-01_P-001" (solid, pour order 4): 12.01,-20.01 17.17,-20.01 17.17,-22.53 12.01,-22.53

## Keep-outs
Keep-Out Layer:
  lines w0.013: -0.002,-6.096 -0.002,-0.635 cw(c0.633,-0.635) 0.633,0 26.168,0 cw(c26.168,-0.5) 26.668,-0.5 26.668,-0.516 ccw(c27.168,-0.516) 27.168,-1.016 37.717,-1.016 cw(c37.717,-1.651) 38.352,-1.651 38.352,-4.834 cw(c37.852,-4.834) 37.852,-5.334 37.836,-5.334 ccw(c37.836,-5.834) 37.336,-5.834 37.336,-8.898 ccw(c37.836,-8.898) 37.836,-9.398 37.852,-9.398 cw(c37.852,-9.898) 38.352,-9.898 ; -0.002,-5.969 ccw(c0.633,-5.969) 0.633,-6.604 5.205,-6.604 cw(c5.205,-7.239) 5.84,-7.239 5.84,-19.82 ccw(c6.34,-19.82) 6.34,-20.32 9.15,-20.32 cw(c9.15,-20.82) 9.65,-20.82 9.65,-24.765 ccw(c10.285,-24.765) 10.285,-25.4 13.02,-25.4 cw(c13.02,-25.9) 13.52,-25.9 13.52,-34.18 ccw(c14.02,-34.18) 14.02,-34.68 37.717,-34.68 ccw(c37.717,-34.045) 38.352,-34.045 38.352,-9.906

## Silkscreen, mask and mechanical layers (free items; w line width, h text height)
Top Overlay:
  lines w0.152: 8.22,-19.22 7.67,-19.22 8.22,-19.77 8.22,-11.67 ; 22.27,-20.07 33.34,-20.08
  text "Reset" at 21.75,-10.23 h0.8 r90
  text "Boot" at 33.79,-19.44 h0.8 r90
  text "GPIO" at 26.95,-19.55 h0.8
  text "21" at 23.08,-21.57 h0.8 r90
  text "20" at 24.261,-21.57 h0.8 r90
  text "19" at 25.542,-21.57 h0.8 r90
  text "18" at 26.824,-21.57 h0.8 r90
  text "11" at 28.105,-21.57 h0.8 r90
  text "10" at 29.386,-21.57 h0.8 r90
  text "9" at 30.667,-21.57 h0.8 r90
  text "8" at 31.948,-21.57 h0.8 r90
  text "5" at 33.229,-21.57 h0.8 r90
  text "26" at 28.215,-29.753 h0.8 r90
  text "27" at 26.934,-29.791 h0.8 r90
  text "25" at 29.496,-29.791 h0.8 r90
  text "23" at 32.058,-29.791 h0.8 r90
  text "22" at 33.339,-29.791 h0.8 r90
  text "24" at 30.777,-29.829 h0.8 r90
  text "3V3" at 25.652,-30.503 h0.8 r90
  text "GND" at 23.19,-30.587 h0.8 r90
  text "GND" at 24.371,-30.587 h0.8 r90
Bottom Overlay:
  lines w0.013: 7.618,-13.97 11.428,-13.97 ; 7.618,-11.43 11.428,-11.43 ; 7.618,-8.89 11.428,-8.89 ; 7.618,-3.81 11.428,-3.81 ; 7.618,-1.27 11.428,-1.27 ; 14.984,-13.97 13.968,-13.97 ; 14.984,-11.43 13.968,-11.43 ; 14.984,-8.89 13.968,-8.89 ; 14.984,-3.81 13.968,-3.81 ; 14.984,-1.27 13.968,-1.27 ; 11.428,-13.97 11.428,-15.24 13.968,-15.24 13.968,-13.97 ; 11.428,-13.97 11.428,-11.43 ; 11.428,-11.43 11.428,-8.89 ; 11.428,-8.89 11.428,-3.81 ; 11.428,-3.81 11.428,-1.27 ; 11.428,-1.27 11.428,-0.508 13.968,-0.508 13.968,-1.27 ; 13.968,-13.97 13.968,-11.43 ; 13.968,-11.43 13.968,-8.89 ; 13.968,-8.89 13.968,-3.81 ; 13.968,-3.81 13.968,-1.27
  text "3V3" at 14.76,-9.3 h0.8
  text "RX" at 14.76,-11.84 h0.8
  text "GND" at 22.52,-14.4 h0.8
  text "TX" at 14.76,-14.43 h0.8
  text "v1.0" at 6.49,-19.67 h0.8 r270
Mechanical 15:
  lines w0.013: 3.81,-2.69 3.81,0 3.81,-2.69 ; 3.81,-2.69 3.81,-4.07 3.81,-2.69 ; 3.81,-2.69 0,-2.69 3.81,-2.69
  lines w0.254: 16.997,-1.202 ccw(c16.26,-1.27) 16.999,-1.24